# Altium PCB atom-pcb.PcbDoc
Units mm, origin at the board's own origin, x right, y up, seen from the top; angles counter-clockwise.
Board outline 87.59 x 94.54 mm, 4 copper layers (Top Layer, GND, PWR, Bottom Layer), stack 0.603 mm thick; 74 components, 66 nets, 326 pads, 97 vias.
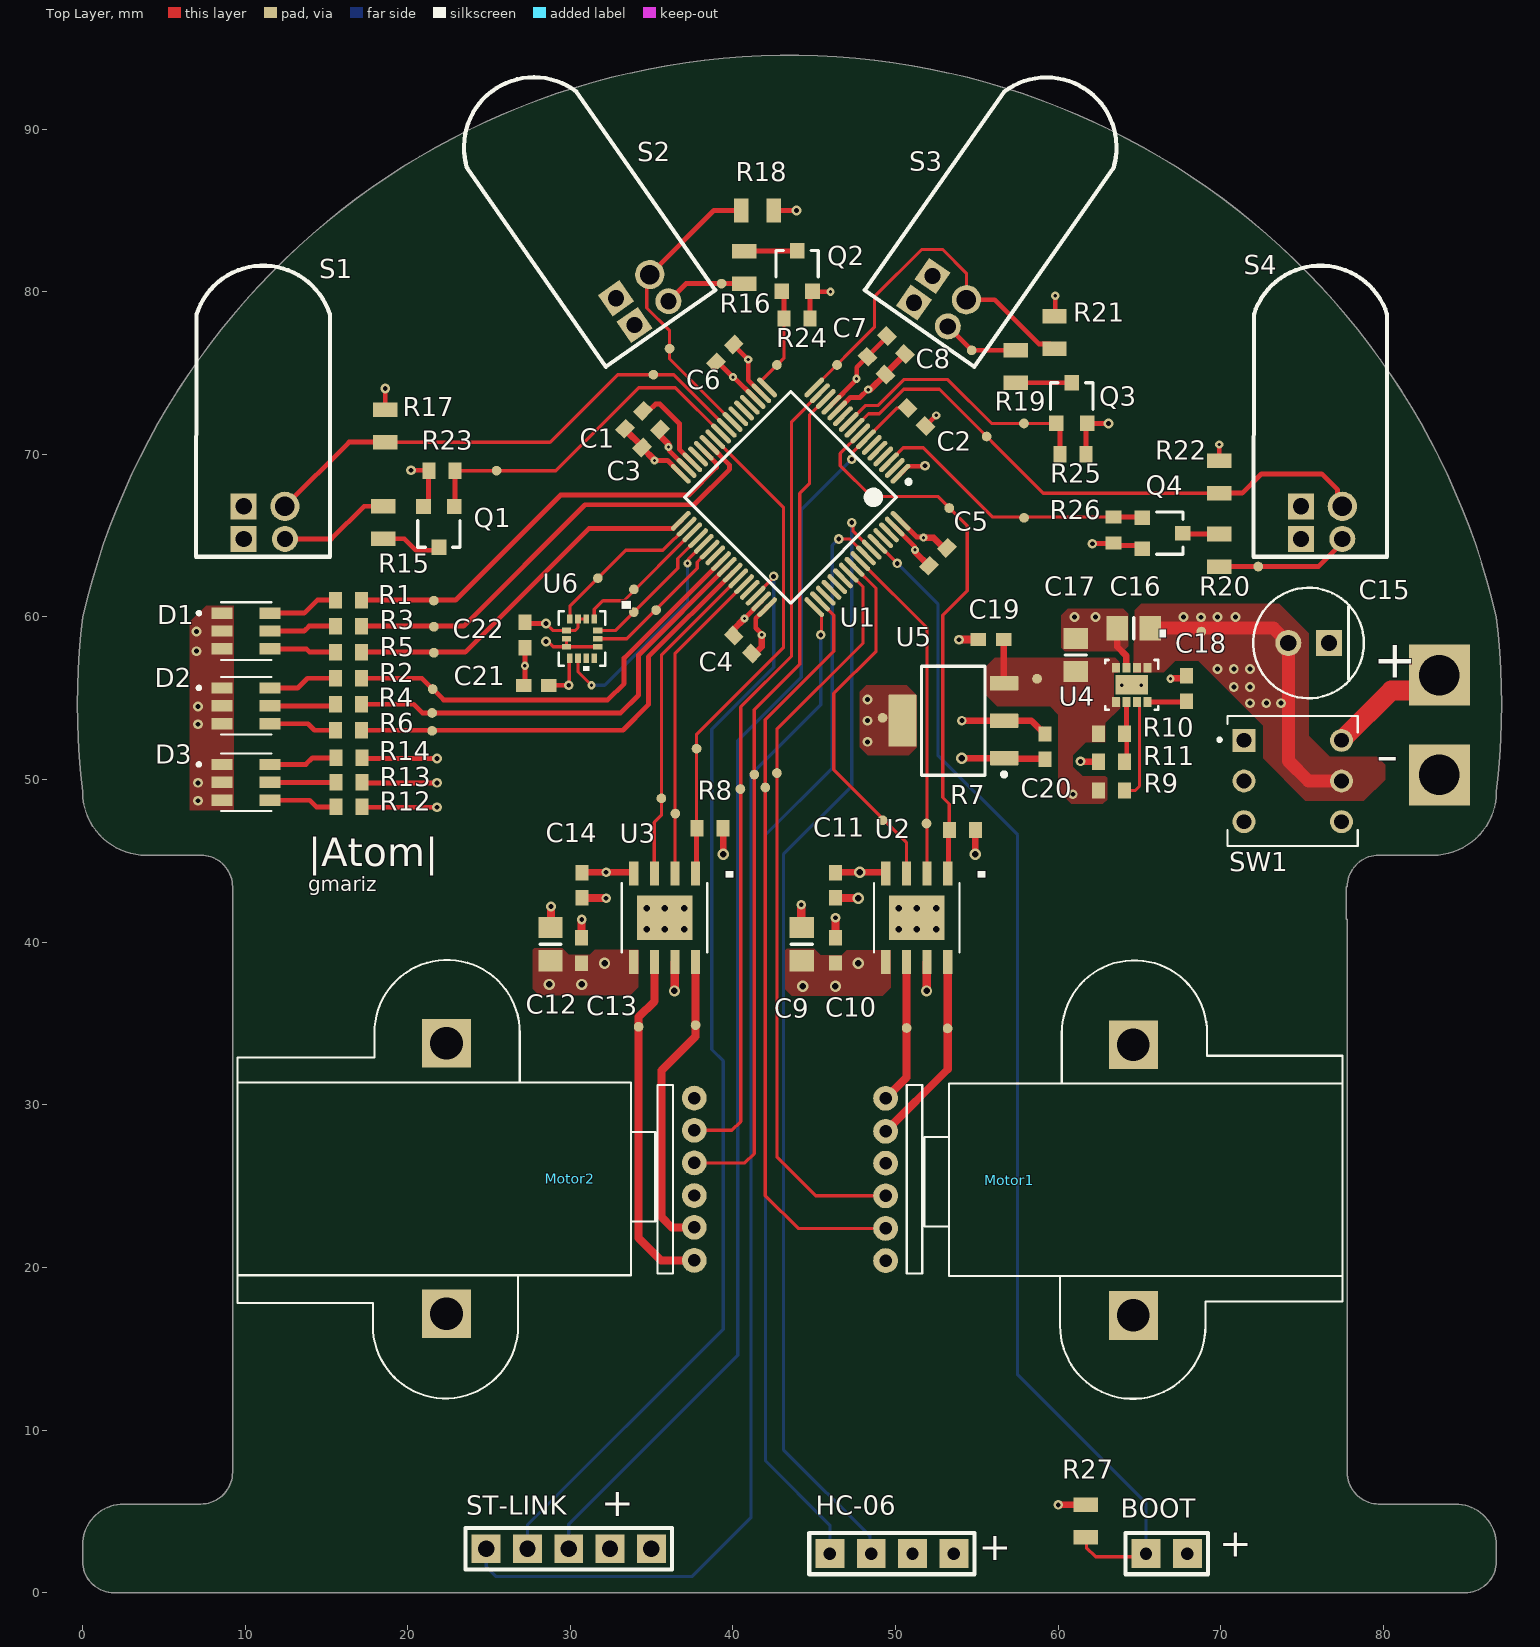
[diagram p0: Top Layer view]
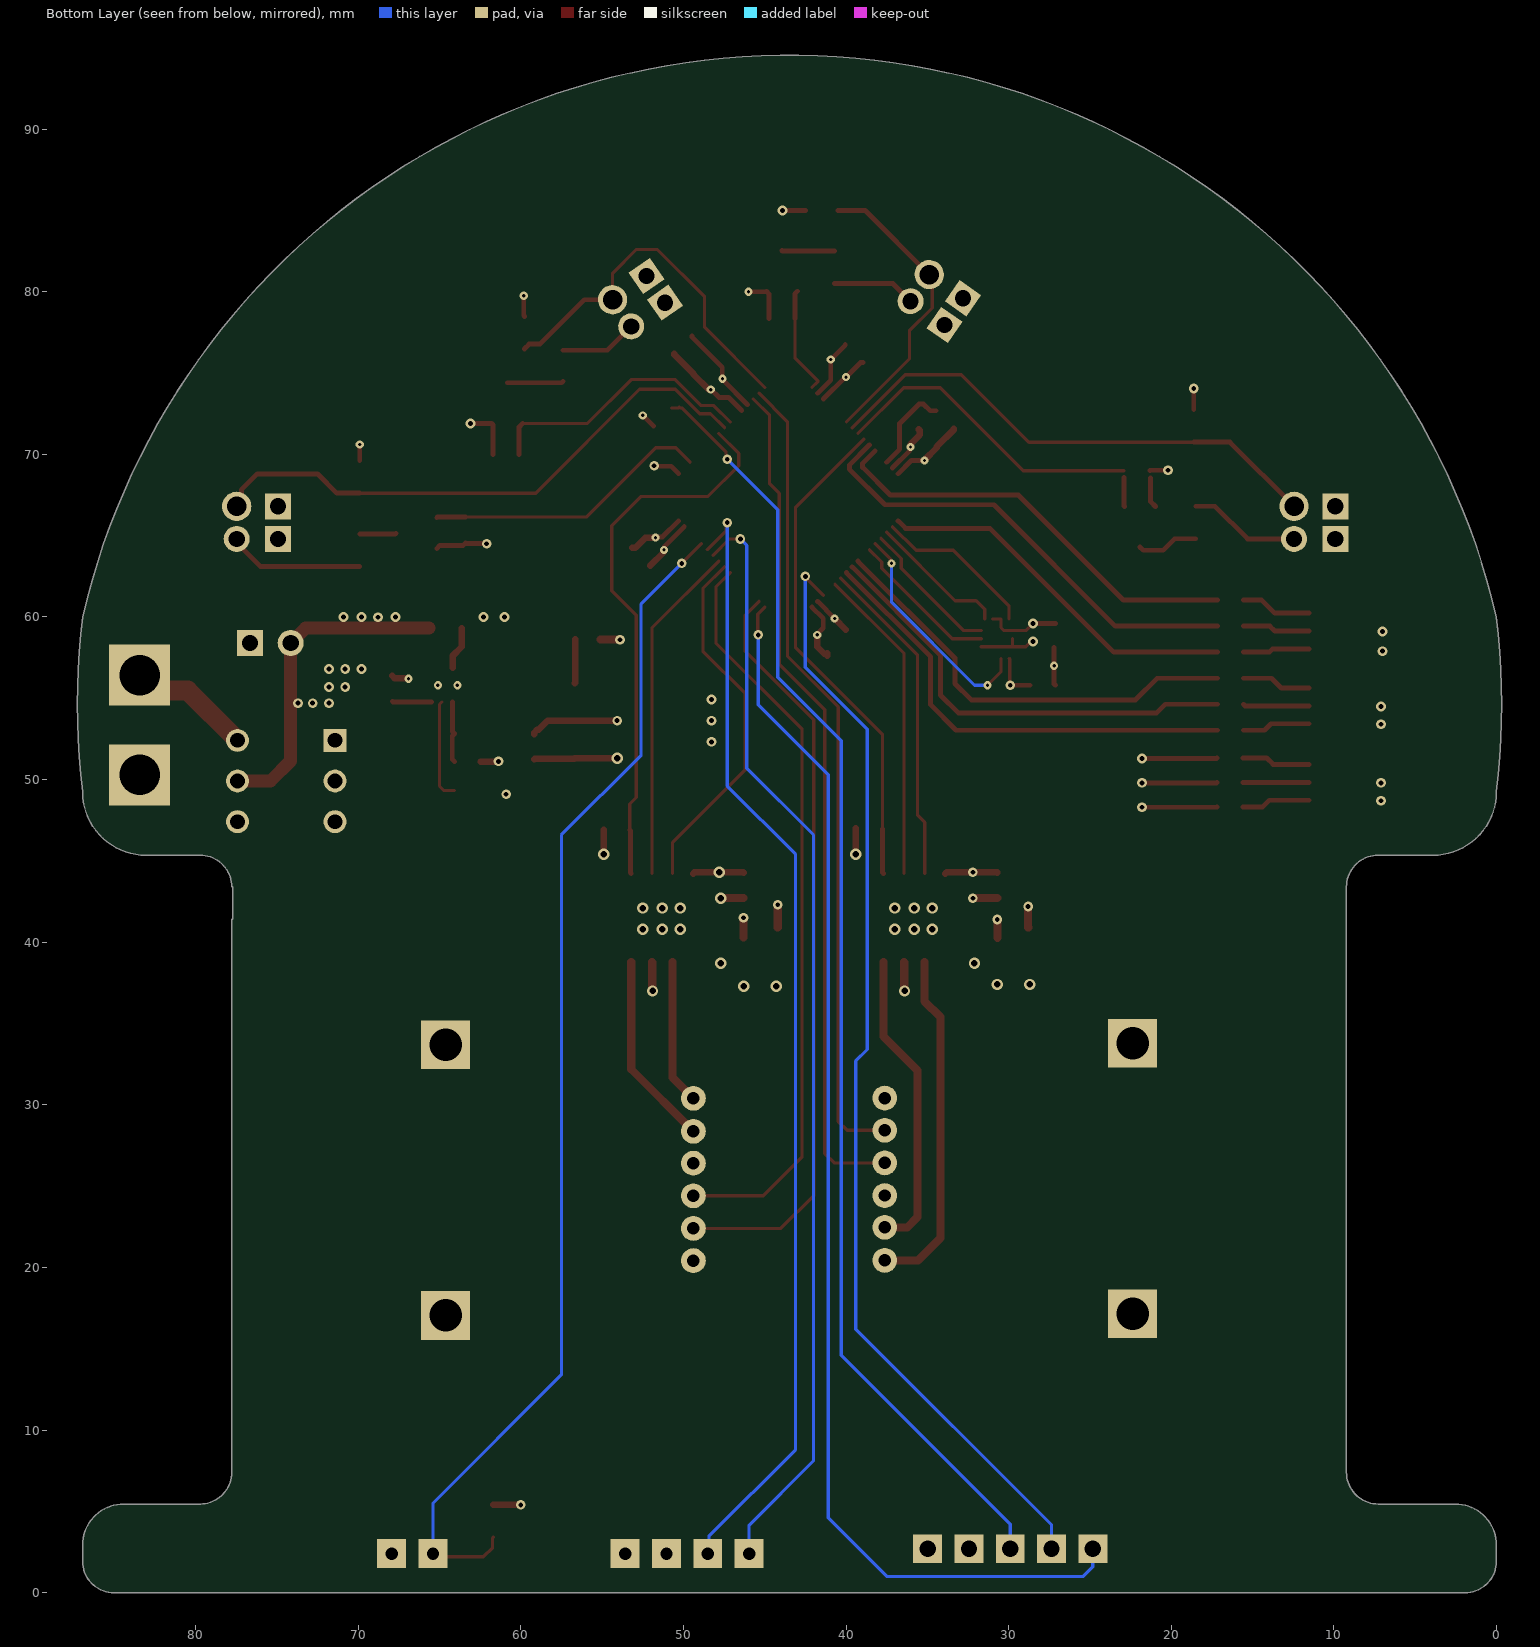
[diagram p1: Bottom Layer view, seen from below]
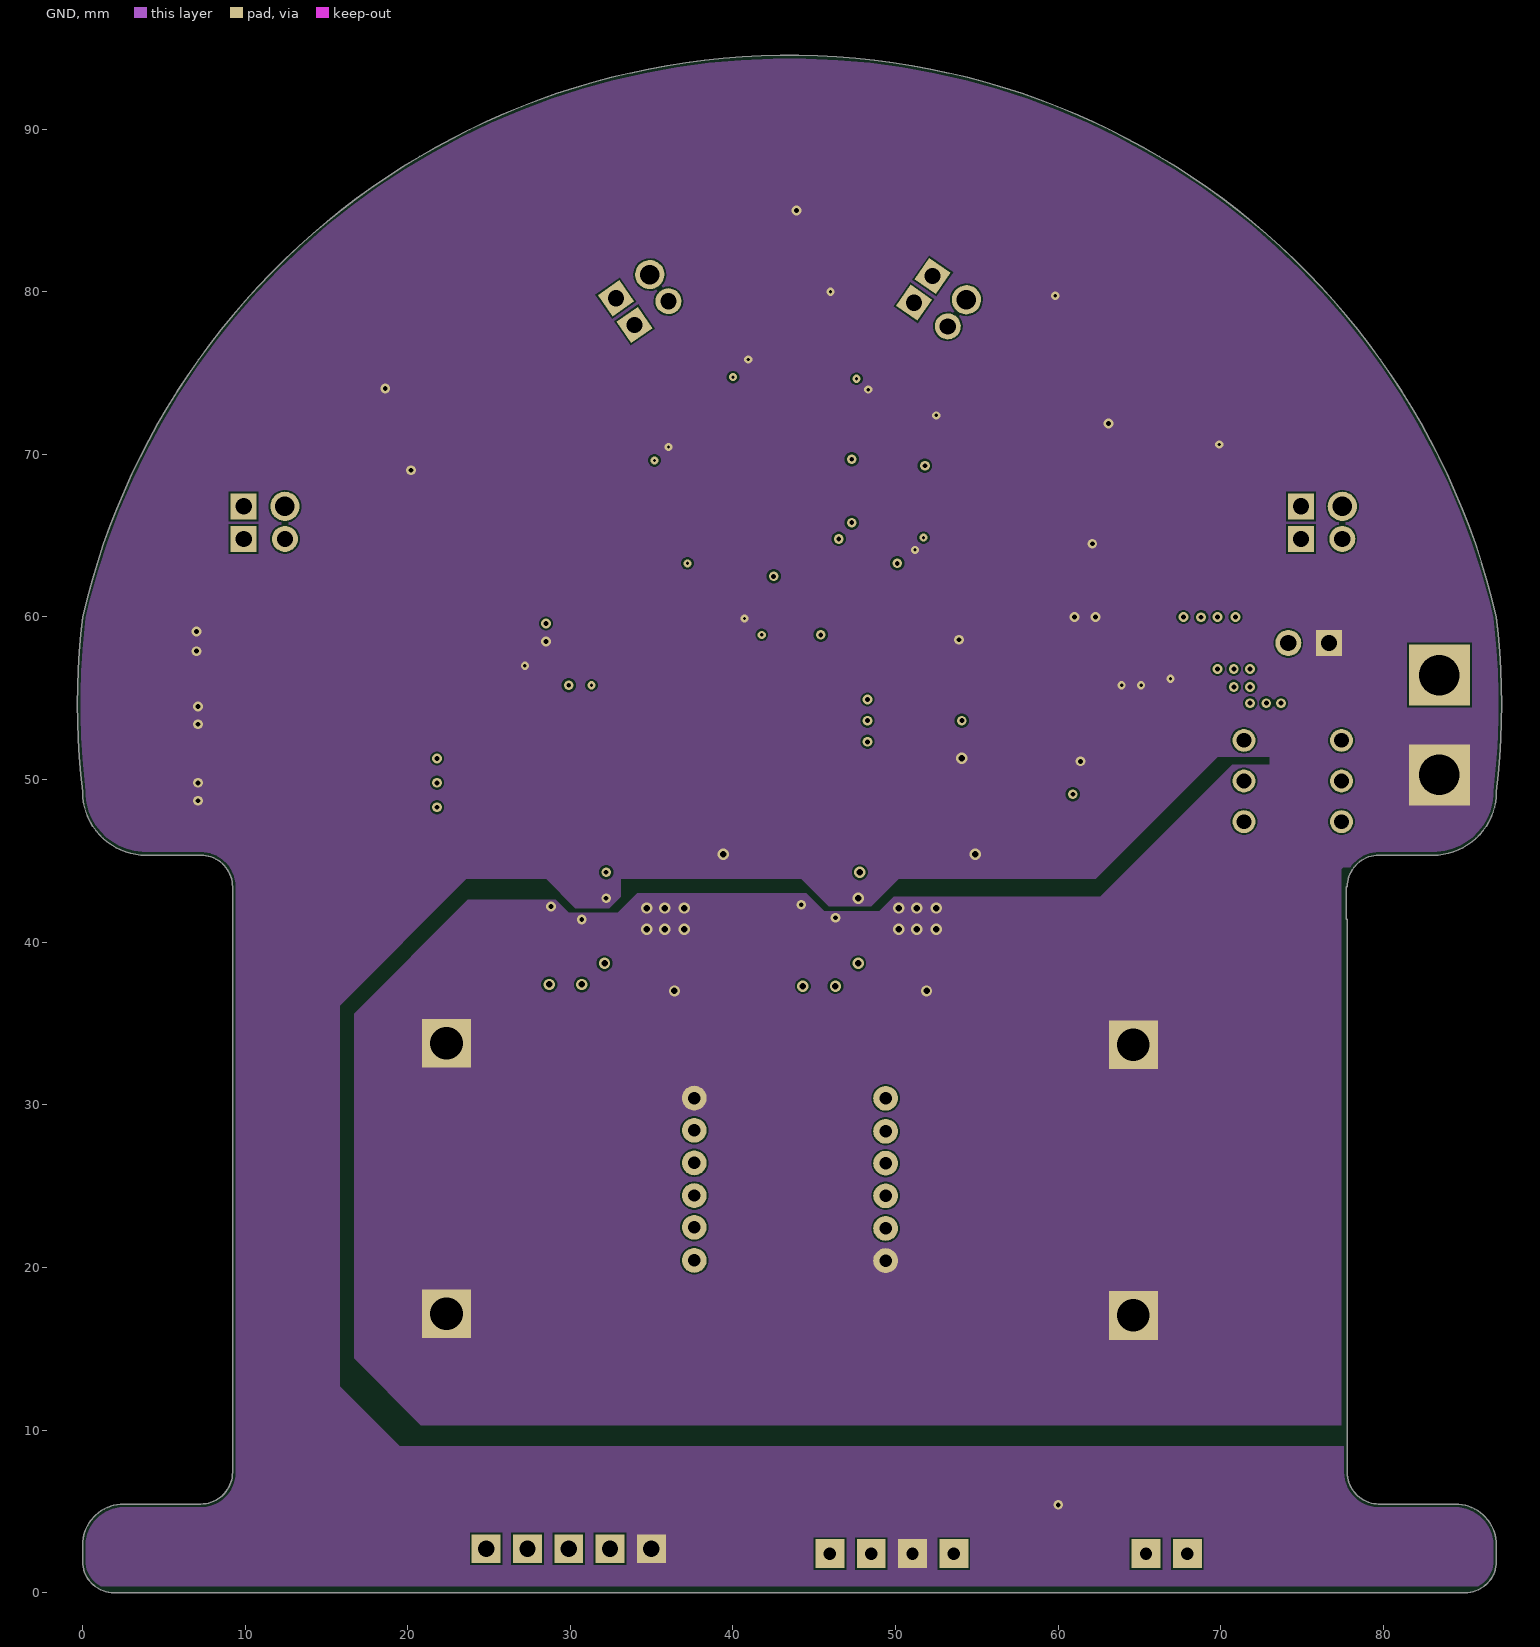
[diagram p2: GND]
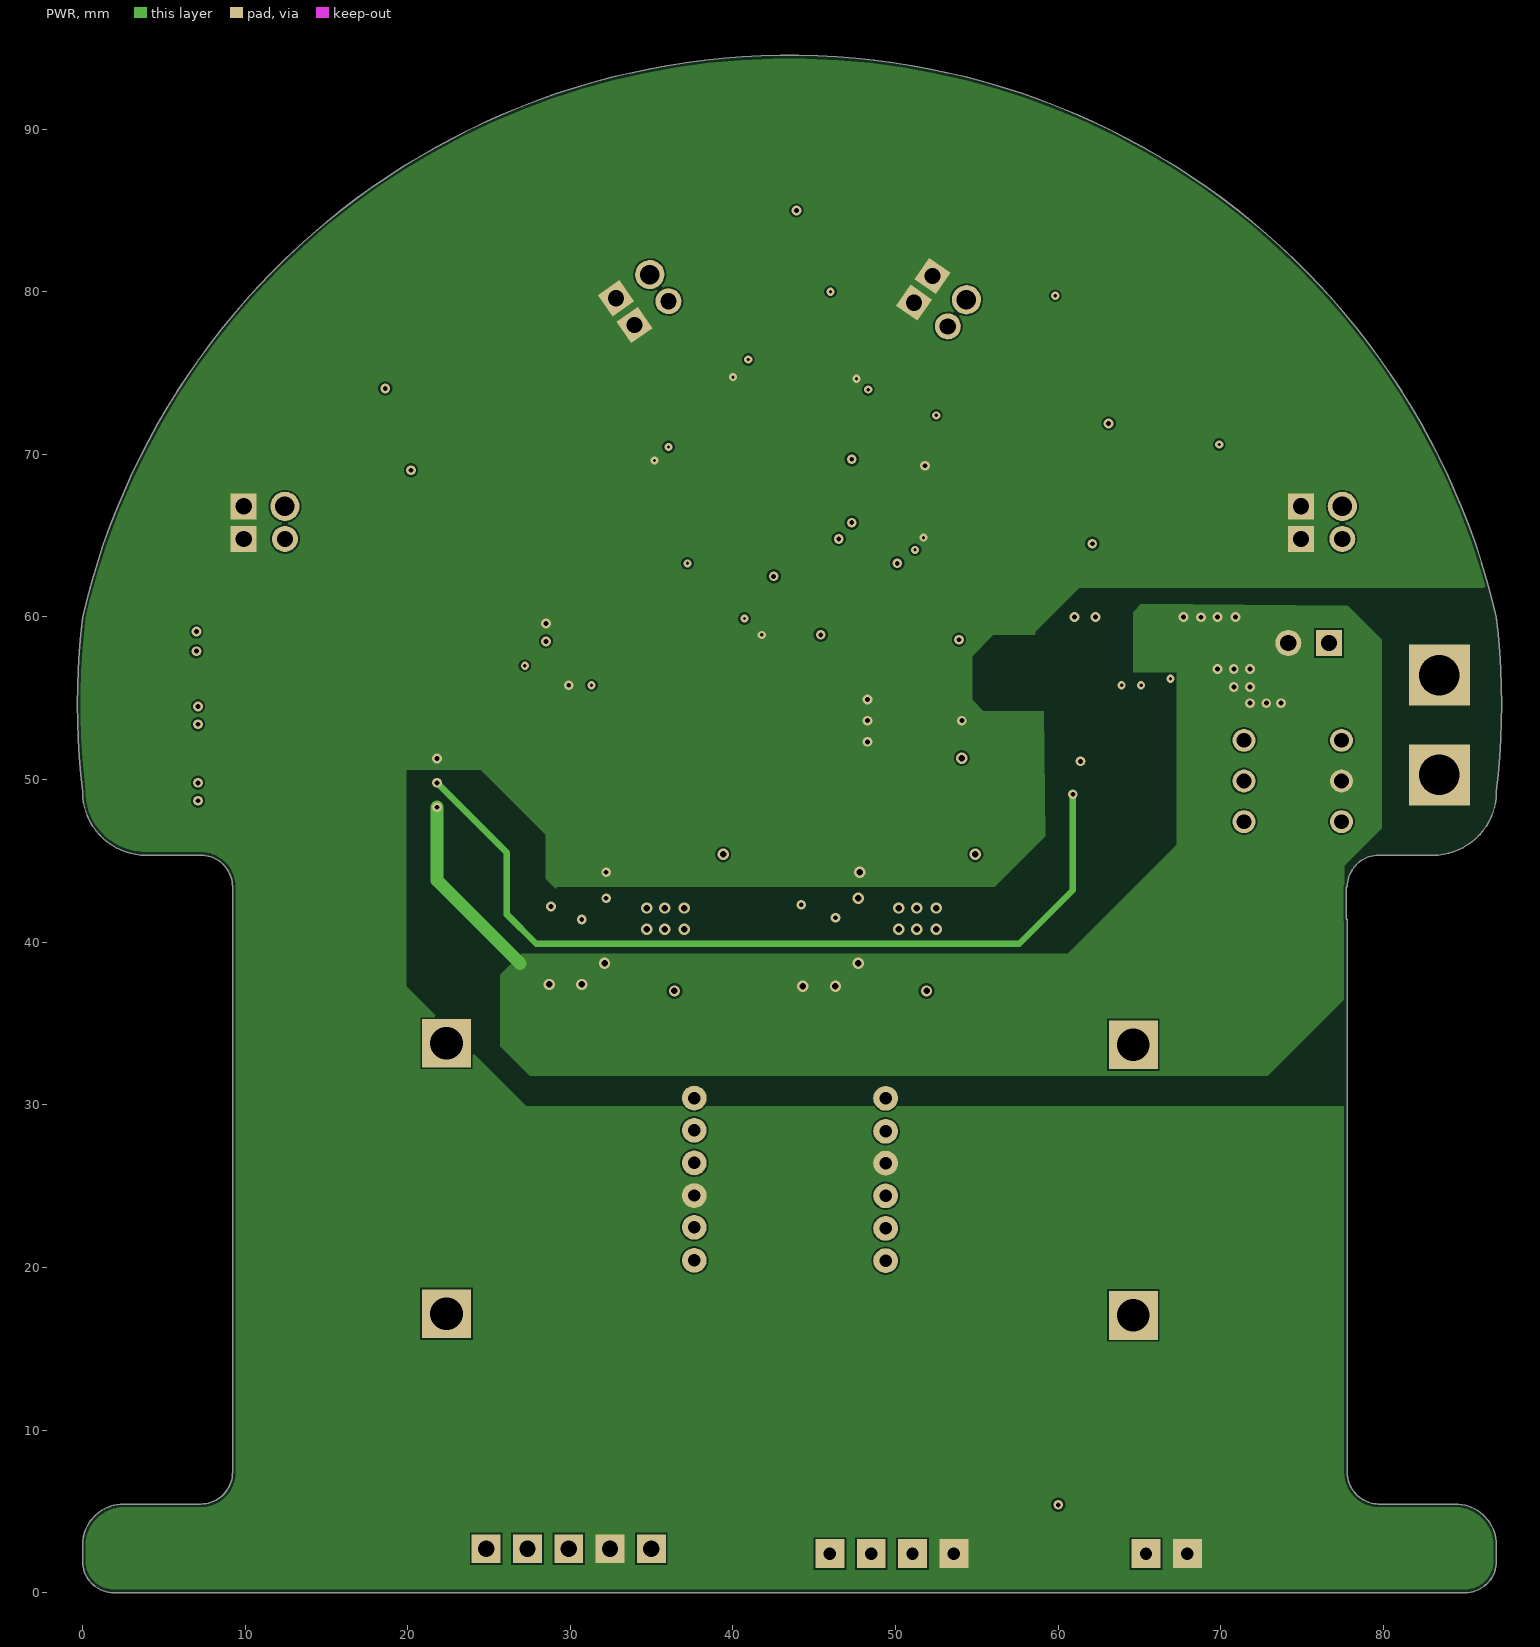
[diagram p3: PWR]

## Layer stack, top to bottom
Top Solder: solder mask 0.0102, Solder Resist, Dk 3.5
Top Layer: signal copper 0.0356
Dielectric 2: prepreg 0.0711, PP-006, Dk 4.1
GND: signal copper 0.035
Dielectric 1: dielectric 0.32, FR-4, Dk 4.8
PWR: signal copper 0.035
Dielectric 3: prepreg 0.0711, PP-006, Dk 4.1
Bottom Layer: signal copper 0.0356
Bottom Solder: solder mask 0.0102, Solder Resist, Dk 3.5

## Board outline
0,1.932 ccw(c1.935,1.932) 1.935,-0.002 85.015,-0.002 ccw(c85.015,1.932) 86.95,1.932 86.95,2.918 ccw(c84.421,2.918) 84.421,5.446 79.675,5.446 79.725,5.449 cw(c79.725,7.399) 77.775,7.399 77.775,41.399 77.725,41.397 77.725,43.397 77.775,43.4 cw(c79.725,43.4) 79.725,45.35 79.675,45.348 83.034,45.348 ccw(c83.034,49.264) 86.95,49.264 ccw(c42.387,54.631) 86.95,59.998 ccw(c43.475,49.915) 0,59.998 ccw(c44.563,54.631) 0,49.264 ccw(c3.916,49.264) 3.916,45.348 7.275,45.348 7.275,45.35 cw(c7.275,43.4) 9.225,43.4 9.225,7.399 cw(c7.275,7.399) 7.275,5.449 7.275,5.446 2.529,5.446 ccw(c2.529,2.918) 0,2.918

## Design rules (kind name [scope] priority, off if disabled: settings)
BoardOutlineClearance [All] p1: gap=0.2 ignorepadtopadclearanceinfootprint=FALSE
Clearance [All] p1: gap=0.102 ignorepadtopadclearanceinfootprint=FALSE except(0.127: Arc-Via Track-Via SMDPad-Via THPad-Via Via-Via Via-Fill Via-Poly Via-Region Via-Text; 0.25: Arc-Hole Track-Hole SMDPad-Hole THPad-Hole Via-Hole Fill-Hole Poly-Hole Region-Hole Text-Hole)
ComponentClearance [All] p1: gap=0.102 collisioncheckmode=3 verticalgap=0.102 showdistances=TRUE
DiffPairsRouting [All] p1: maxlimit=0.102 minlimit=0.102 mostfreqgap=0.102 toplayer_minwidth=0.102 toplayer_maxwidth=1816.048 toplayer_prefwidth=0.102 midlayer1_minwidth=0.102 midlayer1_maxwidth=1816.048 midlayer1_prefwidth=0.102 midlayer2_minwidth=0.102 midlayer2_maxwidth=1816.048 midlayer2_prefwidth=0.102 bottomlayer_minwidth=0.102 bottomlayer_maxwidth=1816.048 bottomlayer_prefwidth=0.102 maxuncoupledlength=12.7
Height [All] p1: minheight=0 maxheight=1816.048 prefheight=12.7
HoleSize [All] p1: absolutevalues=TRUE maxlimit=6.3 minlimit=0.2 maxpercent=80.000 minpercent=20.000
HoleToHoleClearance [All] p1: gap=0.25 allowstackedmicrovias=FALSE
MinimumAnnularRing [All] p1: minimumring=0.076
MinimumSolderMaskSliver [All] p1: minsoldermaskwidth=0
PlaneClearance [All] p1: clearance=0.102
PolygonConnect PolygonConnectPowerPads [All vs (InPadClass('PowerPads'))] p1: connectstyle=Direct reliefconductorwidth=0.254 reliefentries=4 polygonreliefangle="90 Angle" airgapwidth=0.254
PolygonConnect [All] p2: connectstyle=Direct reliefconductorwidth=0.102 reliefentries=4 polygonreliefangle="90 Angle" airgapwidth=0.102
RoutingVias [All] p1: holewidth=0.2 width=0.45 viastyle="Through Hole" minholewidth=0.2 minwidth=0.45 maxholewidth=6.3 maxwidth=6.55
SilkToSilkClearance [All] p1: silktosilkclearance=0
SilkToSolderMaskClearance [IsPad] p1: minsilkscreentomaskgap=0.102 clearancetoexposedcopper=TRUE
SolderMaskExpansion [All] p1: expansion=0.075 istentingtop=FALSE
SupplyNets "Schematic Supply Nets_4" [InNet('GND')] p1: voltage=0.000
SupplyNets "Schematic Supply Nets_3" [InNet('VCC')] p2: voltage=0.000
SupplyNets "Schematic Supply Nets_2" [InNet('+3V3')] p3: voltage=0.000
SupplyNets "Schematic Supply Nets_1" [InNet('Vbat')] p4: voltage=0.000
SupplyNets "Schematic Supply Nets" [InNet('+5')] p5: voltage=0.000
Width [All] p1: maxlimit=1816.048 minlimit=0.102 preferedwidth=0.102
21 further rules are at their usual default settings.

## Classes and differential pairs
component class 5_power: + - C15 C16 C17 C18 C19 C20 D3 R9 R10 R11 R12 R13 R14 SW1 U4 U5
component class 4_sensores: Q1 Q2 Q3 Q4 R15 R16 R17 R18 R19 R20 R21 R22 R23 R24 R25 R26 S1 S2 S3 S4
component class 3_imu: C21 C22 U6
component class 2_drivers_e_Motores: C9 C10 C11 C12 C13 C14 Motor1 Motor2 R7 R8 U2 U3
component class 1_micro: BOOT C1 C2 C3 C4 C5 C6 C7 C8 D1 D2 HC-06 R1 R2 R3 R4 R5 R6 R27 ST-LINK U1

## Components (designator, comment, footprint, x,y, rotation, side; value= is the part's Value field where it differs from the comment)
+ "FURO" FURO_2,5MM 83.439,56.425 r0 top (schematic designator J1)
- "FURO" FURO_2,5MM 83.439,50.292 r0 top (schematic designator J2)
BOOT "CONECTOR_2PIN" CON2 65.4,2.4 r0 top
C1 "CAP" 0603 33.916,72.128 r225 top
C2 "CAP" 0603 51.291,72.303 r135 top
C3 "CAP" 0603 34.966,70.978 r225 top
C4 "CAP" 0603 40.6,58.3 r315 top
C5 "CAP" 0603 52.6,63.7 r45 top
C6 "CAP" 0603 39.497,76.2 r225 top
C7 "CAP" 0603 48.816,75.453 r135 top
C8 "CAP" 0603 50.016,76.728 r135 top
C9 "CAP" "CAP 0805" 44.218,39.878 r270 top
C10 "CAP" 0603 46.3,39.5 r270 top
C11 "CAP" 0603 46.3,43.5 r90 top
C12 "CAP" "CAP 0805" 28.78,39.878 r270 top
C13 "CAP" 0603 30.685,39.497 r270 top
C14 "CAP" 0603 30.7,43.5 r90 top
C15 "56uF" FP-PSG-F05-MFG 75.4,58.4 r180 top
C16 "CAP" "CAP 0805" 64.643,59.309 r0 top
C17 "CAP" "CAP 0805" 61.087,57.658 r270 top
C18 "CAP" 0603 67.9,55.6 r270 top
C19 "CAP" 0603 55.873,58.623 r0 top
C20 "CAP" 0603 59.173,52.023 r90 top
C21 "CAP" 0603 27.9,55.8 r0 top
C22 "CAP" 0603 27.2,58.9 r90 top
D1 "KRTBLSLPS1.32-VUVX-EQ+BTBV-D8+TWTZ-L1-B" LED_KRTBLSLPS1.32-VUVX-EQ+BTBV-D8+TWTZ-L1-B 10.054,59.135 r0 top
D2 "KRTBLSLPS1.32-VUVX-EQ+BTBV-D8+TWTZ-L1-B" LED_KRTBLSLPS1.32-VUVX-EQ+BTBV-D8+TWTZ-L1-B 10.054,54.535 r0 top
D3 "KRTBLSLPS1.32-VUVX-EQ+BTBV-D8+TWTZ-L1-B" LED_KRTBLSLPS1.32-VUVX-EQ+BTBV-D8+TWTZ-L1-B 10.054,49.831 r0 top
HC-06 "" CON4 45.96,2.4 r0 top
Motor1 "Micro Motor c/ Encoder" "Micro Metal c/ Encoder" 51.387,9.417 r0 top
Motor2 "Micro Motor c/ Encoder" "Micro Metal c/ Encoder" 35.619,41.415 r180 top
Q1 "2N7002" STM-SOT-23-3_V 21.919,65.545 r180 top
Q2 "2N7002" STM-SOT-23-3_V 43.942,81.28 r0 top
Q3 "2N7002" STM-SOT-23-3_V 60.833,73.152 r0 top
Q4 "2N7002" STM-SOT-23-3_V 66.421,65.151 r270 top
R1 "RESISTOR" "RES 0603" 16.354,61.036 r180 top value=100R
R2 "RESISTOR" "RES 0603" 16.354,56.235 r180 top value=100R
R3 "RESISTOR" "RES 0603" 16.354,59.436 r180 top value=100R
R4 "RESISTOR" "RES 0603" 16.354,54.635 r180 top value=100R
R5 "RESISTOR" "RES 0603" 16.354,57.835 r180 top value=100R
R6 "RESISTOR" "RES 0603" 16.354,53.035 r180 top value=100R
R7 "RESISTOR" "RES 0603" 54.1,46.9 r180 top value=1k
R8 "RESISTOR" "RES 0603" 38.6,47 r180 top value=1k
R9 "RESISTOR" "RES 0603" 63.273,49.323 r0 top value=100k
R10 "RESISTOR" "RES 0603" 63.273,52.823 r180 top value=52k3
R11 "RESISTOR" "RES 0603" 63.273,51.097 r0 top value=10k
R12 "RESISTOR" "RES 0603" 16.383,48.323 r0 top value=1k
R13 "RESISTOR" "RES 0603" 16.383,49.831 r0 top value=1k
R14 "RESISTOR" "RES 0603" 16.383,51.339 r0 top value=100R
R15 "RESISTOR" "RES 0805" 18.49,65.812 r90 top value=180R
R16 "RESISTOR" "RES 0805" 40.7,81.5 r270 top value=180R
R17 "RESISTOR" "RES 0805" 18.617,71.752 r270 top value=68R
R18 "RESISTOR" "RES 0805" 41.5,85 r180 top value=68R
R19 "RESISTOR" "RES 0805" 57.4,75.4 r90 top value=180R
R20 "RESISTOR" "RES 0805" 69.9,64.1 r270 top value=180R
R21 "RESISTOR" "RES 0805" 59.773,77.49 r270 top value=68R
R22 "RESISTOR" "RES 0805" 69.9,68.615 r270 top value=68R
R23 "RESISTOR" "RES 0603" 22.1,69 r0 top value=100k
R24 "RESISTOR" "RES 0603" 43.942,78.359 r180 top value=100k
R25 "RESISTOR" "RES 0603" 60.9,70 r180 top value=100k
R26 "RESISTOR" "RES 0603" 63.396,65.351 r90 top value=100k
R27 "RESISTOR" "RES 0805" 61.7,4.4 r270 top value=10k
S1 "SFH4550 & SFH313" umouse-sensor-fp 9.906,64.802 r0 top
S2 "SFH4550 & SFH313" umouse-sensor-fp 33.947,77.962 r35 top
S3 "SFH4550 & SFH313" umouse-sensor-fp 51.128,79.327 r325 top
S4 "SFH4550 & SFH313" umouse-sensor-fp 74.93,64.802 r0 top
ST-LINK "CONECTOR_5PIN" CON5 34.98,2.7 r180 top
SW1 "TL2285EE" SW_TL2285EE 74.422,49.911 r270 top
U1 "STM32F411RET6TR" STM-LQFP64_L 43.545,67.36 r225 top
U2 "DRV8251ADDAR" SOIC8_DDA_TEX 51.3,41.5 r270 top
U3 "DRV8251ADDAR" SOIC8_DDA_TEX 35.8,41.5 r270 top
U4 "TPS82140SILR" SIL0008D_SMD 64.523,55.823 r270 top
U5 "TLV1117LV33" DCY0004A_N 53.548,53.623 r180 top
U6 "LSM6DSRXTR" LGA-14L_STM 30.719,58.664 r270 top

## Footprints (in the part's own frame and the unit in brackets; to place one, negate y for a bottom-side part, rotate by r counter-clockwise, add the part's x,y. Pads: shape width x height; smd on the part's side, far side on the other; paste and mask are expansions set on the pad)
0603 [mm]
  rect 0.95x0.8 smd: 1(-0.78,0) 2(0.78,0)
  body extent -0.8,-0.4 0.8,0.4, height 0.78
"CAP 0805" [mm] "0805"
  rect 1.3x1.5 smd: 1(-1.016,0) 2(1.016,0)
  silkscreen extent 0,-0.65 0,0.65, body extent -1.03,-0.61 0.97,0.59, height 0.88
CON2 [mil]
  rect 70x70 hole 30: 1(0,0) 2(100,0)
  silkscreen extent -50,-50 150,50, body extent -42,-47 143,45, height 519
CON4 [mil]
  rect 70x70 hole 30: 1(0,0) 2(100,0) 3(200,0) 4(300,0)
  silkscreen extent -50,-50 350,50, body extent -50,-47 343,45, height 519
CON5 [mil]
  rect 70x70 hole 39.37: 1(0,0) 2(100,0) 3(200,0) 4(300,0) 5(400,0)
  silkscreen extent -50,-50 450,50, body extent -50,-47 443,45, height 519
DCY0004A_N [mm] "SOT223, 4-Leads, Body 6.7x3.7mm, Pitch 2.3mm, IPC Medium Density"
  rrect11% 1.75x0.9 smd: 1(-3.125,2.3) 2(-3.125,0) 3(-3.125,-2.3)
  rrect6% 1.75x3.2 smd: 4(3.125,0)
  silkscreen extent -3.25,-3.35 1.95,3.42, body extent -3.5,-3.25 3.5,3.25, height 1.62
FP-PSG-F05-MFG [mm]
  rect 1.6x1.6 hole 1 paste-2539.97 mask+0: 1(-1.25,0)
  round 1.6 hole 1 paste-2539.97 mask+0: 2(1.25,0)
  silkscreen extent -3.4,-3.4 3.4,3.4, body extent -3.5,-3.5 3.5,3.5, height 0.25
FURO_2,5MM [mm]
  rect 3.75x3.75 hole 2.5: 1(0,0)
LED_KRTBLSLPS1.32-VUVX-EQ+BTBV-D8+TWTZ-L1-B [mm]
  rect 1.3x0.7 smd paste-0.05: A1(1.475,1.1) A2(1.475,0) A3(1.475,-1.1) C1(-1.475,1.1) C2(-1.475,0) C3(-1.475,-1.1)
  silkscreen extent -3,-1.77 1.55,1.77
LGA-14L_STM [mm]
  rect 0.577x0.352 smd paste+0 mask+0.05: 1(-1.21,0.75) 2(-1.21,0.25) 3(-1.21,-0.25) 4(-1.21,-0.75) 8(1.21,-0.75) 9(1.21,-0.25) 10(1.21,0.25) 11(1.21,0.75)
  rect 0.352x0.577 smd paste+0 mask+0.05: 5(-0.5,-0.956) 6(0,-0.956) 7(0.5,-0.956) 12(0.5,0.956) 13(0,0.956) 14(-0.5,0.956)
  silkscreen extent -1.68,-1.42 1.96,1.42, body extent -1.55,-1.3 1.55,1.3, height 0.87
"Micro Metal c/ Encoder" [mil] "Motor pololu com encoder e mancal acoplados"
  round 60 hole 30: 1(-78.74,433.07) 2(-78.74,511.07) 3(-78.74,590.07) 4(-78.74,669.07) 5(-78.74,746.07) 6(-78.74,826.07)
  rect 118.11x118.11 hole 78.74: 1(521.18,300.5) 1(521.18,955.5)
  silkscreen extent -28,99 1028,1160, body extent -193,0 1402,1259, height 866
"RES 0603" [mm]
  rect 0.8x1 smd: 1(-0.8,0) 2(0.8,0)
  body extent -0.8,-0.41 0.8,0.41, height 0.46
"RES 0805" [mm] "0805 (1/8W)"
  rect 0.9x1.5 smd: 1(-1,0) 2(1,0)
  body extent -1.02,-0.62 0.95,0.6, height 0.48
SIL0008D_SMD [mm]
  rect 0.6x0.5 smd paste-0.05 mask-0.051: 1(-1.05,0.975) 2(-1.05,0.325) 3(-1.05,-0.325) 4(-1.05,-0.975) 5(1.05,-0.975) 6(1.05,-0.325) 7(1.05,0.325) 8(1.05,0.975)
  rect 1.2x2 smd paste-0.6 mask-0.051: 9(0,0)
  silkscreen extent -1.53,-1.63 1.53,1.63, body extent -1.4,-1.5 1.4,1.5, height 1.31
SOIC8_DDA_TEX [mil]
  rect 57.5x22 smd paste+0 mask+0: 1(-107.25,75) 2(-107.25,25) 3(-107.25,-25) 4(-107.25,-75) 5(107.25,-75) 6(107.25,-25) 7(107.25,25) 8(107.25,75)
  rect 107x134 smd paste-66.5 mask+0: 9(0,0)
  silkscreen extent -84,-104 84,104, body extent -122,-99 122,99, height 67
STM-LQFP64_L [mm] "QFP, 64-Leads, Body 10x10mm, Pitch 0.5mm, IPC High Density"
  oval 1.6x0.3 smd: 1(-5.8,3.75) 2(-5.8,3.25) 3(-5.8,2.75) 4(-5.8,2.25) 5(-5.8,1.75) 6(-5.8,1.25) 7(-5.8,0.75) 8(-5.8,0.25) 9(-5.8,-0.25) 10(-5.8,-0.75) 11(-5.8,-1.25) 12(-5.8,-1.75) 13(-5.8,-2.25) 14(-5.8,-2.75) 15(-5.8,-3.25) 16(-5.8,-3.75) 33(5.8,-3.75) 34(5.8,-3.25) 35(5.8,-2.75) 36(5.8,-2.25) 37(5.8,-1.75) 38(5.8,-1.25) 39(5.8,-0.75) 40(5.8,-0.25) 41(5.8,0.25) 42(5.8,0.75) 43(5.8,1.25) 44(5.8,1.75) 45(5.8,2.25) 46(5.8,2.75) 47(5.8,3.25) 48(5.8,3.75)
  oval 0.3x1.6 smd: 17(-3.75,-5.8) 18(-3.25,-5.8) 19(-2.75,-5.8) 20(-2.25,-5.8) 21(-1.75,-5.8) 22(-1.25,-5.8) 23(-0.75,-5.8) 24(-0.25,-5.8) 25(0.25,-5.8) 26(0.75,-5.8) 27(1.25,-5.8) 28(1.75,-5.8) 29(2.25,-5.8) 30(2.75,-5.8) 31(3.25,-5.8) 32(3.75,-5.8) 49(3.75,5.8) 50(3.25,5.8) 51(2.75,5.8) 52(2.25,5.8) 53(1.75,5.8) 54(1.25,5.8) 55(0.75,5.8) 56(0.25,5.8) 57(-0.25,5.8) 58(-0.75,5.8) 59(-1.25,5.8) 60(-1.75,5.8) 61(-2.25,5.8) 62(-2.75,5.8) 63(-3.25,5.8) 64(-3.75,5.8)
  silkscreen extent -5.92,-4.6 4.6,4.6, body extent -5,-5 5,5, height 1.6
STM-SOT-23-3_V [mm] "SOT23, 3-Leads, Body 3.016x2.8mm, Pitch 0.95mm"
  rect 0.9x0.95 smd: 1(-0.95,-1.25) 2(0.95,-1.25) 3(0,1.25)
  silkscreen extent -1.3,-0.38 1.3,1.25, body extent -1.14,-1.25 1.17,1.36, height 1.25
SW_TL2285EE [mm]
  rect 1.408x1.408 / inner round 1.408 / far side rect 1.408x1.408 hole 0.9: 1(-2.5,-3)
  round 1.408 hole 0.9: 2(0,-3) 3(2.5,-3) 4(-2.5,3) 5(0,3) 6(2.5,3)
  silkscreen extent -4,-4.6 4,4, body extent -4,-4 4,4, height 13.5
umouse-sensor-fp [mm]
  rect 1.6x1.6 hole 1 mask+0: 1(0,0) 4(0,2)
  round 1.6 hole 1 mask+0: 2(2.54,0)
  round 1.8 hole 1.2 mask+0: 3(2.54,2)
  silkscreen extent -2.92,-1.1 5.3,16.8, body extent -2.8,-0.3 5.2,14.3, height 13.5

## Part data
+ -: library part "FURO NA PLACA", "Furo", Criado em=26/06/2012, Criado por="Luigi Eduardo", Pertence a="Trincabotz CEFET-MG"
C1 C2 C3 C4 C5 C6 C7 C8 C9 C10 C11 C12 C13 C14 C16 C17 C18 C19 C20 C21 C22: library part "CAP. CERÂMICO", "Capacitor", Criado em=26/06/2012, Criador por="Luigi Eduardo", Pertence a=Trincabotz
  C1 C3: Valor=4.7uF
  C2 C5 C6 C7 C8 C10 C11 C13 C14 C19 C20 C21 C22: Valor=100nF
  C4: Valor=1uF
  C9 C12 C16 C17: Valor=22uF
  C18: Valor=33nF
C15: library part CMP-33769-000002-1, "CAP ALUM POLY 56UF 20% 25V T/H / APSG250ELL560MF05S / https://www.mouser.com/ProductDetail/Chemi-Con/APSG250ELL560MF05S?qs=nxZbHzLpdvcfhTNzSmDv4w%3D%3D", Leakage Current=500uA, Manufacturer="United Chemi-Con", Manufacturer Part Number=APSG250ELL560MF05S, Package=PSG-F05, Ripple Current=2600mA, Temperature="-55°C to +105°C", Temperature Range High=+105°C, Temperature Range Low=-55°C, Tolerance=20%, Voltage Rating=25V, Automotive=No, Capacitance=56uF, Category=Cap, ComponentLink2Description=Datasheet, ComponentLink2URL=http://www.chemi-con.co.jp/cgi-bin/CAT_DB/SEARCH/cat_db_al.cgi?e=e&j=p&pdfname=psg, Device Class L1="Passive Components", Device Class L2=Capacitors, Device Class L3="Polymer Capacitors", Digikey Description="CAP ALUM POLY 56UF 20% 25V T/H", Dissipation Factor=12%, Esr=30mΩ, Height=6mm, Lead Free=Yes, Life=15000Hours, Material=Polymer, Octopart=https://octopart.com/apsg250ell560mf05s-united+chemi-con-70515924, RoHS=TRUE
D1 D2 D3: "Red, Green, Blue (RGB) 621nm Red, 532nm Green, 467nm Blue LED Indication - Discrete 2.05V Red, 2.65V Green, 2.85V Blue 6-SMD, J-Lead", Package="SMD-6 OSRAM Opto Semiconductors Inc.", Availability="In Stock", Check_prices=https://www.snapeda.com/parts/KRTBLSLPS1.32-VUVX-EQ+BTBV-D8+TWTZ-L1-B/OSRAM+Opto+Semiconductors+Inc./view-part/?ref=eda, MF="OSRAM Opto Semiconductors Inc.", MP=KRTBLSLPS1.32-VUVX-EQ+BTBV-D8+TWTZ-L1-B, Price=None, Purchase-URL=https://pricing.snapeda.com/search/part/KRTBLSLPS1.32-VUVX-EQ+BTBV-D8+TWTZ-L1-B/?ref=eda, SnapEDA_Link=https://www.snapeda.com/parts/KRTBLSLPS1.32-VUVX-EQ+BTBV-D8+TWTZ-L1-B/OSRAM+Opto+Semiconductors+Inc./view-part/?ref=snap
HC-06: library part CONECTOR_4PIN
Q1 Q2 Q3 Q4: library part CMP-0434-00001-1, "N-channel 60 V, 1.8 Ohm, 0.35 A STripFET(TM) II Power MOSFET, SOT23", Manufacturer=STMicroelectronics, ComponentLink1Description="Manufacturer URL", ComponentLink1URL=http://www.st.com/, ComponentLink2Description=Datasheet, ComponentLink2URL=http://www.st.com/st-web-ui/static/active/en/resource/technical/document/datasheet/CD00005134.pdf, DatasheetVersion="Rev. 9, 11/2008", Mounting Technology="Surface Mount", PackageDescription="3-Pin SOT23, 3.016 x 2.8 mm Body, 0.95 mm Pitch", PackageReference=SOT-23, PartNumber=2N7002
R1 R2 R3 R4 R5 R6 R7 R8 R9 R10 R11 R12 R13 R14 R15 R16 R17 R18 R19 R20 R21 R22 R23 R24 R25 R26 R27: "Resistor"
SW1: Package=None, Availability=Unavailable, MP=TL2285EE, Price=None
U1: library part CMP-0243-00169-2, "ARM Cortex-M4 32-bit MCU+FPU, 512 KB Flash, 128 KB RAM, 50 I/Os, 64-Pin LQFP, -40 to 85 degC, Tape and Reel", I/Os (High Current)=50, Operating Frequency(F) (Processor speed) (MHz)=100, Package Description=LQFP64, Package Reference="64-Pin Low-profile Quad Flat Package, Body 10 x 10 mm, Pitch 0.5 mm", Supply Voltage(Vcc) min (V)=1.7, ComponentLink1Description="Manufacturer URL", ComponentLink1URL=http://www.st.com/, ComponentLink2Description=Datasheet, ComponentLink2URL=http://www.st.com/st-web-ui/static/active/en/resource/technical/document/datasheet/DM00115249.pdf, Core="ARM Cortex-M4", DatasheetVersion="Rev. 6", FLASH Size (Prog) (kB)=512, Internal RAM Size (kB)=128, Mounting Technology="Surface Mount", Packing="Tape and Reel"
U2 U3 U4: "No Description Available", Mfr_Name="Texas Instruments", RefDes=RefDes
  U2 U3: Type=Type
  U4: Type=TYPE
U5: library part CMP-0395-00503-2, "Single Output LDO, 1 A, Fixed 3.3 V Output, 2 to 5.5 V Input, 4-pin SOT-223 (DCY), -40 to 125 degC, Green (RoHS & no Sb/Br)", Manufacturer="Texas Instruments", PartNumber=TLV1117LV33DCYR, Accuracy(%)=2, Code_JEDEC=TO-261, ComponentLink1Description="Manufacturer URL", ComponentLink1URL=http://www.ti.com/, ComponentLink2Description=Datasheet, ComponentLink2URL=http://www.ti.com/general/docs/lit/getliterature.tsp?genericPartNumber=TLV1117LV33&fileType=pdf, ComponentLink3Description="Package Specification", ComponentLink3URL=http://www.ti.com/litv/pdf/mpds094a, DatasheetVersion=SBVS160A, Eco-Plan="Green (RoHS & no Sb/Br)", Fixed Output Options(V)=3.3, Iout(Max)(A)=1, Iq(Typ)(mA)=0.05, Mounting Technology="Surface Mount", PackageDescription="4-Pin Plastic Small Outline, Body 3.5 x 6.5 mm, Pitch 2.3 mm", PackageReference=DCY0004A, PackageVersion=4202506/B, SubFamily="Single Channel LDO", Vdo(Typ)(mV)=1200, Vin(Max)(V)=5.5, Vin(Min)(V)=2, Vout Adj(Max)(V)=3.3, Vout Adj(Min)(V)=3.3
U6: "No Description Available", Mfr_Name=STMicroelectronics, RefDes=RefDes, Type=Type

## Free pads (board coordinates)
  round 0.6 smd paste-2539.97: 2(21.6,61) 3(21.6,59.4) 4(21.6,57.8) 5(31.685,62.385) 6(33.9,61.7) 7(33.9,60.3) 8(35.275,60.423) 9(21.533,55.567) 10(21.5,54.1) 11(21.5,53) 12(39.3,80.5) 14(46.4,75.5) 15(54.679,76.4) 16(57.89,71.902) 17(55.6,71.1) 18(57.9,66.1) 19(72.3,63.1) 20(58.7,56.2) 21(49.2,53.8) 22(68.8,59.1) 23(49.2,47.5) 24(51.9,47.3) 26(37.758,51.9) 27(36.451,47.907) 28(35.594,48.849) 29(36.1,76.5) 30(35.1,74.9) 32(53.3,66.7) 33(50.68,34.725) 34(53.2,34.7) 35(37.7,34.9) 36(34.2,34.8) 37(42.7,50.4) 38(41.987,49.515) 39(41.309,50.306) 40(40.454,49.418) 41(42.7,75.5)
  round 0.6 smd: 31(25.466,68.997)

## Via types
v1: diameter 0.6, hole 0.3, Top Layer to Bottom Layer, tented both sides, 52 vias
v2: diameter 0.5, hole 0.2, Top Layer to Bottom Layer, tented both sides, 18 vias
v3: diameter 0.7, hole 0.4, Top Layer to Bottom Layer, tented both sides, 13 vias
v4: diameter 0.7, hole 0.4, Top Layer to Bottom Layer, 12 vias
v5: diameter 0.5, hole 0.2, Top Layer to Bottom Layer, 2 vias

## Nets (pads, with @x,y where several pads share a name; then routed paths per layer and width w, separated by ;. In a path a pad name is that pad's centre, name@x,y a point inside that pad or via, vN(x,y) a via of type N, cw(c..) or ccw(c..) an arc to the next point about the centre after c; other vN are vias at no path point)
3V3B: D3.A1 R14.1 | length 4.2
  Top Layer w0.3: D3.A1 13.731,50.931 14.139,51.339 R14.1
5VG: D3.A2 R13.1 | length 4.1
  Top Layer w0.3: D3.A2 R13.1
+3V3: BOOT.2 C1.2 C3.2 C4.2 C5.2 C6.2 C7.2 C8.2 C11.2 C14.2 C20.2 C21.2 C22.2 HC-06.4 Motor1.4 Motor2.4 pad.21 R14.2 S1.1 S1.4 S2.1 S2.4 S3.1 S3.4 S4.1 S4.4 ST-LINK.2 U1.1 U1.13 U1.19 U1.32 U1.48 U1.64 U2.4 U3.4 U5.2 U5.4 U6.2 U6.3 U6.5 U6.8 | length 46.7
  Top Layer w0.2: v1(28.5,59.6) 28.936,59.164 30.283,59.164 30.469,59.351 U6.3 U6.2 ; v1(29.9,55.8) 29.935,55.835 29.935,57.42 U6.8
  Top Layer w0.3: R14.2 17.222,51.3 v1(21.8,51.3) ; C22.2@27.121,59.6 v1(28.5,59.6) ; C21.2 v1(29.9,55.8) ; v2(35.166,69.628) 35.974,69.628 U1.32 ; C6.2 39.102,75.648 v2(40,74.75) 40.044,74.75 U1.19 ; v2(41.766,58.903) 41.766,58.957 41.4,59.323 41.4,59.911 U1.48 ; U1.13 47.553,74.549 47.553,74.615 v2(47.591,74.653) 47.613,74.675 47.613,75.353 C7.2 49.464,77.205 C8.2 ; U1.64 51.292,64.916 51.678,64.916 v2(51.716,64.878) ; U1.1 50.758,69.269 51.769,69.269 v1(51.8,69.3)
  Top Layer w0.4: C14.2 30.71,44.29 32.19,44.29 v1(32.2,44.3) 33.819,44.3 U3.4 ; C1.2 33.364,71.526 34.414,70.476 C3.2 34.414,70.403 35.166,69.651 v2(35.166,69.628) ; C4.2@41.168,57.626 41.168,57.768 41.197,57.738 41.338,57.738 41.766,58.166 v2(41.766,58.903) ; C11.2 46.31,44.29 47.79,44.29 v3(47.8,44.3) 49.319,44.3 U2.4 ; v2(51.716,64.878) 51.735,64.859 52.345,64.859 52.952,64.252 C5.2 ; v1(54.073,53.623) U5.2 58.353,53.623 58.898,53.078 58.973,53.078 59.173,52.878 C20.2
  other v1: 48.273,52.323 48.273,53.623 48.273,54.923
+5: C17.2 C19.2 pad.20 R9.1 R10.2 R13.2 U4.4 U4.5 U5.3 | length 60
  Top Layer w0.3: R13.2 17.214,49.8 v1(21.8,49.8)
  Top Layer w0.4: C19.2 56.653,55.943 U5.3
  PWR w0.4: v1(21.8,49.8) 26.1,45.5 26.1,41.7 27.9,39.9 57.6,39.9 60.9,43.2 v1(60.9,49.1)
ADC_SENS0: pad.30 R17.2 S1.3 U1.24 | length 31.9
  Top Layer w0.2: R17.2 28.752,70.752 32.9,74.9 36.358,74.9 U1.24
  Top Layer w0.3: S1.3 16.396,70.752 R17.2
ADC_SENS1: pad.29 R18.2 S2.3 U1.23 | length 18.6
  Top Layer w0.2: S2.3 34.7,80.876 34.7,79 36.1,77.6 36.1,75.866 U1.23
  Top Layer w0.3: S2.3 38.824,85 R18.2
ADC_SENS2: pad.14 R21.2 S3.3 U1.16 | length 22.9
  Top Layer w0.2: U1.16 48.7,77.818 48.7,79.7 51.6,82.6 52.9,82.6 54.356,81.144 S3.3
  Top Layer w0.3: S3.3 56.091,79.509 58.824,76.776 59.486,76.776 R21.2
ADC_SENS3: pad.17 R22.2 S4.3 U1.9 | length 35.4
  Top Layer w0.2: U1.9 48.332,72.5 49,72.5 50.5,74 52.7,74 59.085,67.615 R22.2
  Top Layer w0.3: R22.2 71.315,67.615 72.5,68.8 76.2,68.8 77.183,67.817 77.183,67.089 S4.3
BOOT0: BOOT.1 R27.2 U1.60 | length 73.6
  Top Layer w0.2: U1.60 48.894,64.496 50.09,63.3 v1(50.1,63.3) ; R27.2 61.733,3.367 61.733,2.767 62.3,2.2 65.2,2.2 BOOT.1
  Bottom Layer w0.2: v1(50.1,63.3) 52.6,60.8 52.6,51.5 57.5,46.6 57.5,13.4 65.4,5.5 BOOT.1
CURR_DRV1: pad.32 R7.2 U1.8 U2.1 | length 34
  Top Layer w0.2: U1.8 46.6,70.061 46.6,69.3 48.486,67.414 52.6,67.414 54.4,65.614 54.4,61.6 52.9,60.1 52.9,48.9 53.3,48.5 R7.2
  Top Layer w0.3: U2.1 53.252,44.272 53.252,46.852 R7.2
CURR_DRV2: pad.26 R8.2 U1.26 U3.1 | length 30.7
  Top Layer w0.2: R8.2@37.753,46.953 37.753,52.753 43.1,58.1 43.1,66.744 U1.26
  Top Layer w0.3: U3.1 37.753,44.272 R8.2@37.753,46.953
Db_B_1: pad.2 R1.1 U1.28 | length 26.5
  Top Layer w0.3: R1.1 22.936,61.036 29.4,67.5 37.276,67.5 38.979,69.203 38.979,69.451 38.666,69.764 U1.28
Db_B_2: pad.9 R2.1 U1.40 | length 27.1
  Top Layer w0.3: R2.1 20.865,56.235 22.2,54.9 32.3,54.9 33.3,55.9 33.3,57.468 U1.40
Db_G_1: pad.3 R3.1 U1.27 | length 28.6
  Top Layer w0.3: R3.1 23.436,59.436 30.9,66.9 37.6,66.9 39.794,69.094 39.794,69.343 U1.27
Db_G_2: pad.10 R4.1 U1.41 | length 27.9
  Top Layer w0.3: R4.1 20.365,54.635 20.9,54.1 33.1,54.1 34.2,55.2 34.2,57.661 U1.41
Db_R_1: pad.4 R5.1 U1.33 | length 23
  Top Layer w0.3: R5.1 23.535,57.835 31.15,65.45 36.333,65.45 U1.33
Db_R_2: pad.11 R6.1 U1.42 | length 28.6
  Top Layer w0.3: R6.1 33.235,53.035 34.8,54.6 34.8,57.554 U1.42
ENCODER1_1: Motor1.3 pad.37 U1.55 | length 46.2
  Top Layer w0.2: U1.55 48,61.844 48,58.4 42.7,53.1 42.7,26.8 45.095,24.405 Motor1.3
ENCODER1_2: Motor1.2 pad.38 U1.50 | length 46.9
  Top Layer w0.2: U1.50 46.2,60.109 46.2,57.9 41.987,53.687 pad.38 41.987,24.413 44.001,22.399 Motor1.2
ENCODER2_1: Motor2.3 pad.39 U1.14 | length 52.1
  Top Layer w0.2: Motor2.3 40.727,26.427 41.3,27 41.3,50.306 41.3,54.3 44.1,57.1 44.1,67.6 44.7,68.2 44.7,72.404 U1.14
ENCODER2_2: Motor2.2 pad.40 U1.15 | length 49.9
  Top Layer w0.2: Motor2.2 39.933,28.433 40.471,28.971 40.471,54.471 43.6,57.6 43.6,72.011 U1.15
FB_5V: R10.1 R11.2 U4.6 | length 3.8
  Top Layer w0.3: R11.2 64.216,51.241 64.216,52.68 R10.1 64.198,52.948 U4.6
FET_GATE0: pad.31 Q1.1 R23.2 U1.25 | length 21.4
  Top Layer w0.2: R23.2 29.1,69 34.2,74.1 36.451,74.1 U1.25
  Top Layer w0.3: Q1.1 22.904,66.83 R23.2@22.904,68.578
FET_GATE1: pad.41 Q2.1 R24.2 U1.17 | length 6.7
  Top Layer w0.2: U1.17 41.739,74.469 41.739,74.534 43.142,75.937 R24.2
  Top Layer w0.3: Q2.1 43.142,79.88 R24.2
FET_GATE2: pad.16 Q3.1 R25.2 U1.10 | length 17
  Top Layer w0.2: U1.10 48.125,73 48.9,73 50.5,74.6 53.2,74.6 55.898,71.902 Q3.1
  Top Layer w0.3: Q3.1 60.1,71.685 R25.2
FET_GATE3: pad.18 Q4.1 R26.2 U1.3 | length 17.7
  Top Layer w0.2: U1.3 50.475,70.4 51.7,70.4 55.949,66.151 R26.2
  Top Layer w0.3: R26.2 65.121,66.151 Q4.1
GND: -.1 C2.1 C3.1 C4.1 C5.1 C6.1 C7.1 C8.1 C9.1 C10.1 C11.1 C12.1 C13.1 C14.1 C15.1 C16.1 C17.1 C18.1 C19.1 C20.1 C21.1 C22.1 D1.C1 D1.C2 D1.C3 D2.C1 D2.C2 D2.C3 D3.C1 D3.C2 D3.C3 HC-06.3 Motor1.1 Motor2.1 Q1.2 Q2.2 Q3.2 Q4.2 R7.1 R8.1 R11.1 R17.1 R18.1 R21.1 R22.1 R23.1 R24.1 R25.1 R26.1 R27.1 ST-LINK.1 U1.12 U1.18 U1.31 U1.47 U1.63 U2.7 U2.9 U3.7 U3.9 U4.3 U4.9 U5.1 U6.6 U6.7 U6.12 | length 69.8
  Top Layer w0.2: v1(28.5,58.5) 28.608,58.5 28.944,58.164 U6.7 U6.12 ; U6.7@29.763,58.264 U6.6
  Top Layer w0.3: R17.1 v1(18.617,74.054) ; v1(20.196,69.022) 21.278,69.022 R23.1 ; Q1.2 21.269,67.095 21.269,67.293 21.271,67.296 R23.1@21.271,68.541 ; C21.1 27.2,55.88 v2(27.2,57) C22.1 ; v2@36.079,70.229 U1.31 ; C6.1 40.049,76.72 v2(40.941,75.828) 40.941,74.56 U1.18 ; v2(40.7,59.9) 41.195,60.395 41.195,60.413 U1.47 ; R18.1 v1(43.9,85) ; R24.1 44.742,79.88 Q2.2 44.922,80 v2(46,80) ; U1.12 47.211,73.5 47.804,73.5 48.282,73.978 v2(48.316,73.978) ; U1.63 51.153,64.348 51.153,64.166 v2(51.191,64.128) ; C2.1 51.851,71.751 v2(52.5,72.4) ; R21.1 59.817,78.534 v2(59.817,79.756) ; R25.1 61.7,71.819 Q3.2 61.785,71.9 v1(63.1,71.9) ; v1(62.1,64.5) 62.125,64.525 63.37,64.525 R26.1 63.547,64.4 64.972,64.4 Q4.2 ; R22.1 v2(69.9,70.6)
  Top Layer w0.4: C3.1 35.465,71.477 35.465,71.194 36.022,70.636 36.022,70.472 v2(36.041,70.453) ; v3(39.4,45.4) R8.1 ; C4.1@40.011,59.211 v2(40.7,59.9) ; v2(48.316,73.978) 48.335,73.997 48.463,73.997 C7.1 49.368,74.939 50.568,76.139 C8.1 ; v2(51.191,64.128) 51.21,64.109 51.21,63.987 C5.1 ; v3(54.073,51.323) U5.1 56.713,51.283 59.133,51.283 C20.1 ; v3(54.9,45.4) R7.1 ; v1(60,5.4) R27.1 ; v1(61.373,51.123) 61.386,51.11 62.46,51.11 R11.1 ; C16.1 63.627,58.173 64.198,57.602 U4.3 ; v2(66.9,56.2) 66.919,56.219 67.739,56.219 C18.1
  Top Layer w0.5: C12.1 28.8,40.914 v1(28.8,42.2) ; C13.1 30.693,40.285 30.693,41.393 v1(30.7,41.4) ; C14.1 30.71,42.71 32.19,42.71 v1(32.2,42.7) ; v3(36.4,37) 36.418,37.018 36.418,38.758 U3.7 ; v1(44.2,42.3) 44.2,40.912 C9.1 ; C10.1 v1(46.3,41.5) ; C11.1 46.31,42.71 47.69,42.71 v3(47.7,42.7) ; v3(51.9,37) 51.917,37.018 51.917,38.758 U2.7 ; v1(53.9,58.6) 53.927,58.6 53.95,58.623 C19.1
  other v1: 7.1,48.7 7.1,49.8 7.1,53.4 7.1,54.5 7,57.9 7,59.1 61,60 62.3,60
  other v4: 34.7,40.8 35.8,40.8 37,40.8 50.2,40.8 51.3,40.8 52.5,40.8 34.7,42.1 35.8,42.1 37,42.1 50.2,42.1 51.3,42.1 52.5,42.1
  other v5: 63.9,55.8 65.1,55.8
HC06-RX: HC-06.2 U1.59 | length 69.5
  Top Layer w0.2: v1(47.3,65.8) 47.377,65.723 47.377,65.296 U1.59
  Bottom Layer w0.2: v1(47.3,65.8) 47.3,49.6 43.1,45.4 43.1,8.8 48.428,3.472 48.428,2.472 HC-06.2
HC06-TX: HC-06.1 U1.58 | length 68
  Top Layer w0.2: v1(46.5,64.8) 47.166,64.8 U1.58
  Bottom Layer w0.2: HC-06.1 45.96,4.14 42,8.1 42,46.6 46.1,50.7 46.1,64.4 v1(46.5,64.8)
INPUT_DRV1: pad.24 U1.57 U2.2 | length 20.9
  Top Layer w0.2: U1.57 51.935,59.323 U2.2
INPUT_DRV2: pad.27 U1.44 U3.2 | length 19.6
  Top Layer w0.2: U3.2 36.435,57.775 U1.44
Interrupt1_IMU: pad.5 U1.34 U6.4 | length 10
  Top Layer w0.2: U6.4 29.969,60.669 33.4,64.1 35.689,64.1 U1.34
Interrupt2_IMU: U1.37 U6.9 | length 14
  Top Layer w0.2: U6.9 30.469,56.631 v2(31.3,55.8) ; v2(37.2,63.3) 37.257,63.357 37.257,63.547 U1.37
  Bottom Layer w0.2: v2(31.3,55.8) 32.1,55.8 37.2,60.9 v2(37.2,63.3)
LEDB1: D1.A1 R1.2 | length 4.4
  Top Layer w0.3: D1.A1 13.635,60.235 14.436,61.036 R1.2
LEDB2: D2.A1 R2.2 | length 4.3
  Top Layer w0.3: D2.A1 13.235,55.635 13.835,56.235 R2.2
LEDG1: D1.A2 R3.2 | length 4.1
  Top Layer w0.3: D1.A2 13.635,59.135 13.936,59.436 R3.2
LEDG2: D2.A2 R4.2 | length 4.1
  Top Layer w0.3: D2.A2 15.454,54.535 R4.2
LEDR1: D1.A3 R5.2 | length 4.1
  Top Layer w0.3: D1.A3 13.765,58.035 13.965,57.835 R5.2
LEDR2: D2.A3 R6.2 | length 4.2
  Top Layer w0.3: D2.A3 13.865,53.435 14.265,53.035 R6.2
MOTOR1_1: Motor1.6 pad.33 U2.6 | length 8.9
  Top Layer w0.5: Motor1.6 50.665,31.678 U2.6
MOTOR1_2: Motor1.5 pad.34 U2.8 | length 12
  Top Layer w0.5: Motor1.5 53.205,32.186 U2.8
MOTOR2_1: Motor2.6 pad.36 U3.6 | length 21.4
  Top Layer w0.5: U3.6 35.165,36.365 34.2,35.4 34.2,21.8 35.568,20.432 Motor2.6
MOTOR2_2: Motor2.5 pad.35 U3.8 | length 18.8
  Top Layer w0.5: Motor2.5 36.236,22.464 35.6,23.1 35.6,32.1 37.705,34.205 U3.8
NetQ1_3: Q1.3 R15.1 | length 3.8
  Top Layer w0.3: R15.1 19.788,64.812 20.5,64.1 21.724,64.1 Q1.3
NetQ2_3: Q2.3 R16.1 | length 3.3
  Top Layer w0.3: R16.1 43.912,82.5 Q2.3
NetQ3_3: Q3.3 R19.1 | length 3.5
  Top Layer w0.3: R19.1@57.4,74.5 57.498,74.402 Q3.3
NetQ4_3: Q4.3 R20.1 | length 2.3
  Top Layer w0.3: Q4.3 67.722,65.1 R20.1
NetR15_2: R15.2 S1.2 | length 6.9
  Top Layer w0.3: S1.2 15.302,64.802 17.312,66.812 R15.2
NetR16_2: pad.12 R16.2 S2.2 | length 5.1
  Top Layer w0.3: S2.2 37.109,80.5 R16.2
NetR19_2: pad.15 R19.2 S3.2 | length 4.8
  Top Layer w0.3: S3.2 pad.15 R19.2
NetR20_2: pad.19 R20.2 S4.2 | length 8.4
  Top Layer w0.3: R20.2 76,63.1 77.47,64.57 S4.2
NRST: C2.2 ST-LINK.3 U1.7 | length 79.2
  Top Layer w0.2: v1(47.3,69.7) 47.377,69.777 47.377,70.13 U1.7 50.101,72.855 50.209,72.855 50.262,72.908 50.315,72.855 C2.2
  Bottom Layer w0.2: ST-LINK.3 29.9,4.2 40.3,14.6 40.3,52.4 44.2,56.3 44.2,66.6 v1(47.3,69.7)
PG_5V: R9.2 U4.7 | length 6.3
  Top Layer w0.2: R9.2 64.723,49.323 65,49.6 65,54.456 64.998,54.458 64.998,54.623 U4.7
PWM_DRV1: pad.23 U1.56 U2.3 | length 22.3
  Top Layer w0.2: U1.56 48.8,61.751 48.8,57.9 46.2,55.3 46.2,50.6 50.665,46.135 U2.3
PWM_DRV2: pad.28 U1.43 U3.3 | length 20.3
  Top Layer w0.2: U3.3 35.165,47.365 35.6,47.8 35.6,57.647 U1.43
PWM_FAN: U1.39
SPI_MISO: pad.6 U1.35 U6.1 | length 8.6
  Top Layer w0.2: U6.1 31.469,60.469 32,61 33.296,61 U1.35
SPI_MOSI: pad.7 U1.36 U6.14 | length 8.9
  Top Layer w0.2: U6.14 32.764,59.164 36.6,63 36.6,63.596 U1.36
SPI_SCK: pad.8 U1.38 U6.13 | length 9.4
  Top Layer w0.2: U6.13 33.464,58.664 37.8,63 37.8,63.382 U1.38
SS_reg5V: C18.2 U4.8 | length 2.4
  Top Layer w0.3: U4.8 67.853,54.773 C18.2
SWCLK: ST-LINK.5 U1.49 | length 77.1
  Top Layer w0.2: U1.49 45.435,60.166 45.435,58.935 v1(45.4,58.9)
  Bottom Layer w0.2: ST-LINK.5 24.82,1.58 25.4,1 37.5,1 41.1,4.6 41.1,50.3 45.4,54.6 v1(45.4,58.9)
SWDIO: ST-LINK.4 U1.46 | length 68.3
  Top Layer w0.2: U1.46 41.389,61.341 42.5,62.452 v1(42.5,62.5)
  Bottom Layer w0.2: ST-LINK.4 27.36,4.16 39.4,16.2 39.4,32.7 38.7,33.4 38.7,53.1 42.5,56.9 v1(42.5,62.5)
Vbat: +.1 SW1.4 | length 7.6
  Top Layer w1.2: SW1.4@77.462,52.451 80.49,55.479 82.493,55.479 +.1
VCAP: C1.1 U1.30 | length 5.6
  Top Layer w0.3: C1.1 34.821,72.68 35.242,73.1 35.5,73.1 36.7,71.9 36.7,70.316 U1.30
VCC: C9.2 C10.2 C12.2 C13.2 C15.2 C16.2 pad.22 R12.2 SW1.5 U2.5 U3.5 U4.1 U4.2 | length 36.2
  Top Layer w0.3: R12.2 17.206,48.3 v1(21.8,48.3)
  Top Layer w0.8: C16.2 73.241,59.309 C15.2 74.15,51.15 75.389,49.911 SW1.5
  PWR w0.8: v1(21.8,48.3) 21.8,43.8 26.9,38.7
  other v1: 71.8,54.7 72.8,54.7 73.7,54.7 70.8,55.7 71.8,55.7 69.8,56.8 70.8,56.8 71.8,56.8 67.7,60 68.785,59.983 69.8,60 70.9,60
  other v3: 44.3,37.3 46.3,37.3 28.7,37.4 30.7,37.4 32.1,38.7 47.7,38.7
VccR: D3.A3 R12.1 | length 4.2
  Top Layer w0.3: D3.A3 13.969,48.731 14.377,48.323 R12.1
pads on no net: SW1.1 SW1.2 SW1.3 SW1.6 U1.2 U1.4 U1.5 U1.6 U1.11 U1.20 U1.21 U1.22 U1.29 U1.45 U1.51 U1.52 U1.53 U1.54 U1.61 U1.62 U6.10 U6.11

## Polygon pours and split planes (outlines as drawn)
GND on Top Layer "GND_L01_P012" (solid, pour order 12): 9.3,60.7 7.6,60.7 6.6,59.7 6.6,48.1 9.3,48.1
VCC on Top Layer "VCC_L01_P010" (solid, pour order 10): 64.6,56.6 66.5,56.6 67.2,57.3 68.6,57.3 72.6,53.3 72.6,51.3 75.2,48.7 78.8,48.7 80.1,50 80.1,50.9 79.6,51.4 76.7,51.4 75.4,52.7 75.4,59 73.6,60.8 65.1,60.8 64.7,60.4 64.7,60.1
VCC on Top Layer "VCC_L01_P005" (solid, pour order 5): 34.187,39.526 31.487,39.526 31.187,39.226 29.887,39.226 29.487,39.626 27.787,39.626 27.687,39.526 27.687,37.126 28.087,36.726 33.687,36.726 34.187,37.226
VCC on Top Layer "VCC_L01_P004" (solid, pour order 4): 49.7,39.5 47,39.5 46.7,39.2 45.4,39.2 45,39.6 43.3,39.6 43.2,39.5 43.2,37.1 43.6,36.7 49.2,36.7 49.7,37.2
GND on Top Layer "GND_L01_P003" (solid, pour order 3): 64.3,60.2 64,60.5 60.6,60.5 60.2,60.1 60.2,58.1 60.412,57.888 63.988,57.888 64.3,58.2
+5 on Top Layer "+5_L01_P002" (solid, pour order 2): 63.75,57.25 63.5,57.5 56.1,57.5 55.5,56.9 55.5,55.25 56.25,54.5 59.5,54.5 60,54 60,49.3 60.8,48.5 62.75,48.5 63,48.75 63,50.1 62.9,50.2 61.5,50.2 60.9,50.8 60.9,51.5 61.7,52.3 62.9,52.3 62.9,53.5 63.8,54.4 63.8,55 63.4,55 63.4,56.6 63.758,56.6
+3V3 on Top Layer "+3V3_L01_P001" (solid, pour order 1): 51.3,55.2 50.7,55.8 48.2,55.8 47.8,55.4 47.8,52 48.3,51.5 50.8,51.5 51.3,52
VCC on Top Layer "VCC_L01_P000" (solid, pour order 0): 65,60 65,57.6 64.6,57.2 64.6,56.6 66.3,56.6 66.4,56.7 66.4,60
GND on GND "GND_L02_P008" (solid, pour order 8): 94.802,81.798 79.102,97.498 22.102,97.498 -4.198,71.198 -4.198,48.398 -4.198,0.398 87.202,0.398 95.802,8.998 19.502,8.998 15.802,12.698 15.802,36.098 23.602,43.898 28.502,43.898 30.302,42.098 32.402,42.098 33.102,42.798 33.102,43.898 44.202,43.898 45.902,42.198 48.502,42.198 50.202,43.898 62.302,43.898 69.802,51.398 77.886,51.398 78.352,51.648 81.202,48.798 81.702,48.298 94.802,48.298
GND on GND "GND_L02_P007" (solid, pour order 7): 73.9,53.4 73,52.5 73,45.7 74.1,44.6 85.3,44.6 86.048,45.348 88.252,47.552 88.252,50.748 85.6,53.4
GND on GND "GND_L02_P006" (solid, pour order 6): 29.1,42.6 29.9,41.8 32.9,41.8 34.1,43 44.5,43 45.6,41.9 49,41.9 49.9,42.8 62.6,42.8 70.7,50.9 86.5,50.9 86.8,50.6 86.1,49.9 86.1,48.1 83.8,45.8 78.7,45.8 77.4,44.5 77.4,10.3 20.8,10.3 16.7,14.4 16.7,35.6 23.7,42.6
+3V3 on PWR "+3V3_L03_P013" (solid, pour order 13): -2.5,59.681 -2.5,-3.9 0.9,-7.3 84.1,-7.3 92.5,1.1 92,1.6 92,28.1 90.2,29.9 27.3,29.9 19.9,37.3 19.9,59.238
VCC on PWR "VCC_L03_P011" (solid, pour order 11): 65.1,60.8 64.6,60.3 64.6,56.6 67.3,56.6 67.3,46 60.6,39.3 27,39.3 25.7,38 25.7,33.6 27.5,31.8 72.9,31.8 77.6,36.5 77.6,44.7 79.9,47 79.9,58.6 77.8,60.7
+3V3 on PWR "+3V3_L03_P009" (solid, pour order 9): 59.1,54.2 55.4,54.2 54.7,54.9 54.7,57.6 56,58.9 58.6,58.9 58.6,59.1 61.3,61.8 89.9,61.8 91.5,63.4 91.5,82.5 78.9,95.1 21.5,95.1 -1.9,71.7 -1.9,51.4 -1.1,50.6 24.5,50.6 28.5,46.6 28.5,43.9 29.1,43.3 29.2,43.4 56.1,43.4 59.204,46.504

## Silkscreen, mask and mechanical layers (free items; w line width, h text height)
Top Overlay:
  text "." at 65.8,57.756 h5
  text "|Atom|" at 13.881,44.1 h3
  text "gmariz" at 13.88,42.84 h1.52
  text "+" at 31.9,4.114 h3
  text "+" at 69.9,1.614 h3
  text "+" at 55.1,1.414 h3
Mechanical 1:
  lines w0.254: 6.55,5.449 7.275,5.449 ccw(c7.275,7.399) 9.225,7.399 9.225,9.399 9.225,41.399 9.225,43.399 ; 6.55,45.35 7.275,45.35 cw(c7.275,43.4) 9.225,43.4 ; 77.775,43.399 77.775,41.399 77.775,9.399 77.775,7.399 ccw(c79.725,7.399) 79.725,5.449 ; 77.775,43.4 cw(c79.725,43.4) 79.725,45.35 ; 0,1.932 ccw(c1.935,1.932) 1.935,-0.002 85.015,-0.002 ccw(c85.015,1.932) 86.95,1.932 86.95,2.918 ccw(c84.421,2.918) 84.421,5.446 80.4,5.446 79.675,5.446 cw(c79.675,7.396) 77.725,7.396 77.725,9.396 77.725,41.397 77.725,43.397 cw(c79.675,43.398) 79.675,45.348 83.034,45.348 ccw(c83.034,49.264) 86.95,49.264 ccw(c42.387,54.631) 86.95,59.998 ccw(c43.475,49.915) 0,59.998 ccw(c44.563,54.631) 0,49.264 ccw(c3.916,49.264) 3.916,45.348 7.275,45.348 cw(c7.275,43.398) 9.225,43.398 9.225,41.397 9.225,9.396 9.225,7.396 cw(c7.275,7.396) 7.275,5.446 6.55,5.446 2.529,5.446 ccw(c2.529,2.918) 0,2.918 0,1.932

## Text inside footprints (layer, text, board x,y; h text height)
U2: Top 3D Body "*" at 52.456,43.43 h1.27 r270
U3: Top 3D Body "*" at 36.956,43.43 h1.27 r270
U6: Top 3D Body "*" at 31.084,59.955 h1.27 r270